# Allegro board wireless_cmsis_dap_sent_V2.brd
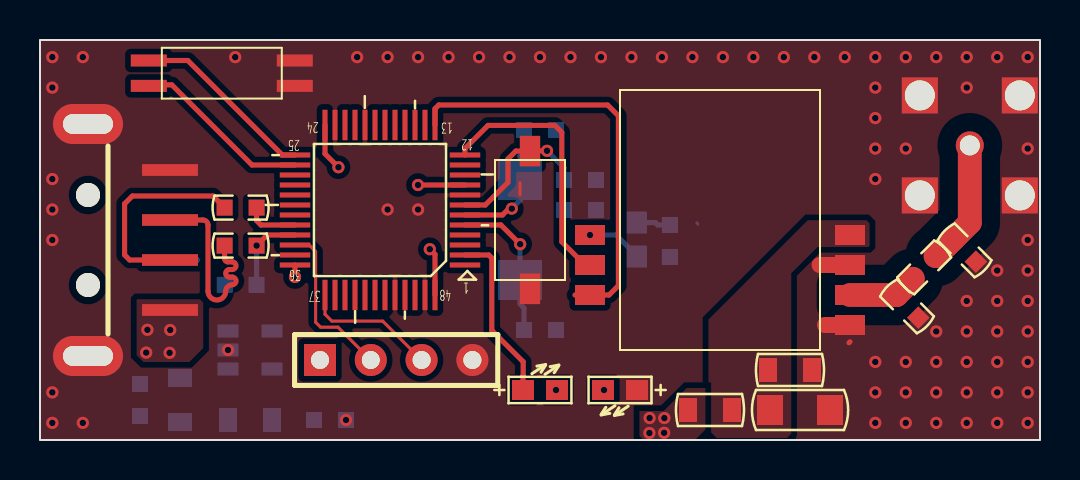
[diagram p0: board, top side]
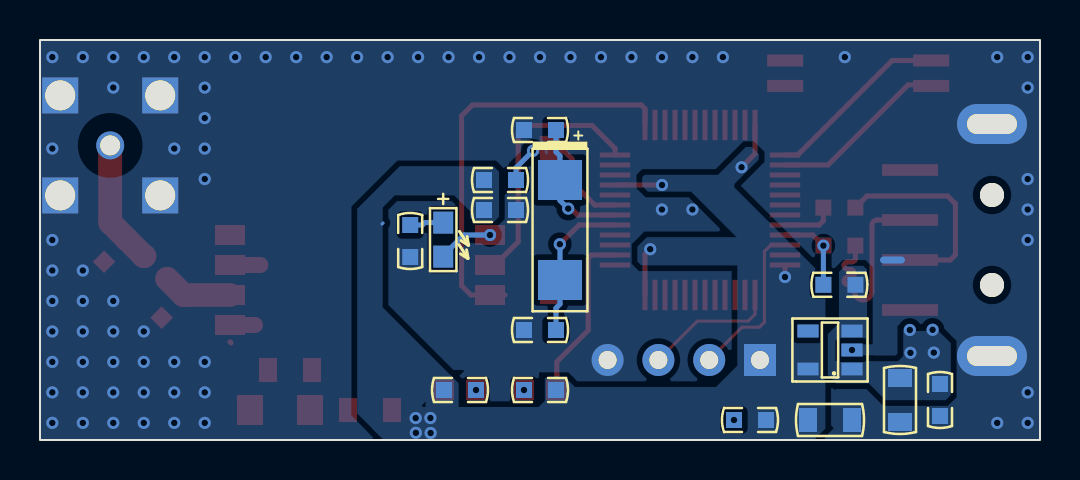
[diagram p1: board, bottom side, seen from below]

Outline 50 x 20 mm; copper layers: TOP, BOTTOM. Coordinates in mm from the lower left corner of the outline.
Outline path: rectangle 0,0 50,20

## Design rules (mm)
constraint set DEFAULT: min track width 0.152

## Placement (name value [footprint] x y rotation side)
C1  20p  [C0603]  25 5.5 180 bottom
C2  20p  [C0603]  25 15.5 180 bottom
C3  105  [C0603]  27 11.5 0 bottom
C4  103  [C0603]  5 2 270 bottom
C6  223  [C0805]  10.5 1 0 bottom
C7  106  [C0603]  14.5 1 180 bottom
C8  103  [C0805]  37.5 3.5 0 top
C9  100u  [C1206]  38 1.5 0 top
C10  223  [C0805]  7 2 270 bottom
C11  0  [C0603]  43.35 6.68 135 top
C12  0  [C0603]  46.23 9.48 135 top
D1  LED  [LED0603]  29.84 10.02 270 bottom
D2  LED  [LED0603]  25 2.5 0 top
D3  LED  [LED0603]  29 2.5 180 top
J1  SWD_DOWNLOAD  [SIP4]  14 4 0 top
J2  SMA  [SMA_KWE]  46.49 14.73 0 top
R1  10K  [C0603]  27 13 0 bottom
R2  20R  [C0603]  10.03 11.62 0 top
R3  20R  [C0603]  10.03 9.72 0 top
R4  4.7K  [C0603]  10.03 7.76 0 bottom
R5  510R  [C0603]  31.49 9.95 90 bottom
R6  510R  [C0603]  25 2.5 0 bottom
R7  510R  [C0603]  29 2.5 180 bottom
R8  0  [C0805]  33.5 1.5 180 top
R9  0  [C0603]  44.21 8.63 225 top
SW1  RST  [KEY_SMD]  24.5 11 90 top
SW2  SW DIP-2/SM  [SWITCH_2_SMD]  9.09 18.34 0 top
U1  STM32F103C8T6  [LQFP48]  17 11.5 180 top
U2  SPX3819M5-L-3-3  [SOT23-5]  10.5 4.5 90 bottom
U3  USB_A  [USB_A_SMT]  4.5 6.5 180 top
U5  HC25_SMT  [HC_25_SMT_N]  34 11 180 top
Y1  CRYSTAL13  [50322]  24 10.5 270 bottom

## Library data of the parts
C1-C4 C6-C12 = CAP NP
D1-D3 = LED
J1 = 4 HEADER
J2 = SMA
R1-R9 = RESISTOR
SW1 = SW MAG-SPST/SM
SW2 = SW DIP-2/SM
U1 = STM32F103C8T6
U2 = SPX3819M5-L-3-3
U3 = USB_A
U5 = HC25_SMT
Y1 = CRYSTAL13_0

## Footprints (pads in the part's own frame, mm; a bottom-side part is the same pattern mirrored in y, then rotated)
50322
  rect 2x2.2 smd: 1(-2.5,0) 2(2.5,0)
C0603
  rect 0.8x0.8 smd: 1(-0.8,0) 2(0.8,0)
C0805
  rect 0.9x1.2 smd: 1(-1.1,0) 2(1.1,0)
C1206
  rect 1.3x1.5 smd: 1(-1.5,0) 2(1.5,0)
HC_25_SMT_N
  rect 1.5x1 smd: 1(-6.5,5.25) 2(-6.5,3.75) 3(-6.5,2.25) 4(-6.5,0.75) 13(6.5,0.75) 14(6.5,2.25) 15(6.5,3.75)
KEY_SMD
  rect 1.524x1.016 smd: 1(-3.445,0) 2(3.445,0)
LED0603
  rect 1.1x1 smd: 1(-0.85,0) 2(0.85,0)
LQFP48
  rect 1.52x0.25 smd: 1(-4.25,2.75) 2(-4.25,2.25) 3(-4.25,1.75) 4(-4.25,1.25) 5(-4.25,0.75) 6(-4.25,0.25) 7(-4.25,-0.25) 8(-4.25,-0.75) 9(-4.25,-1.25) 10(-4.25,-1.75) 11(-4.25,-2.25) 12(-4.25,-2.75) 25(4.25,-2.75) 26(4.25,-2.25) 27(4.25,-1.75) 28(4.25,-1.25) 29(4.25,-0.75) 30(4.25,-0.25) 31(4.25,0.25) 32(4.25,0.75) 33(4.25,1.25) 34(4.25,1.75) 35(4.25,2.25) 36(4.25,2.75)
  rect 0.25x1.52 smd: 13(-2.75,-4.25) 14(-2.25,-4.25) 15(-1.75,-4.25) 16(-1.25,-4.25) 17(-0.75,-4.25) 18(-0.25,-4.25) 19(0.25,-4.25) 20(0.75,-4.25) 21(1.25,-4.25) 22(1.75,-4.25) 23(2.25,-4.25) 24(2.75,-4.25) 37(2.75,4.25) 38(2.25,4.25) 39(1.75,4.25) 40(1.25,4.25) 41(0.75,4.25) 42(0.25,4.25) 43(-0.25,4.25) 44(-0.75,4.25) 45(-1.25,4.25) 46(-1.75,4.25) 47(-2.25,4.25) 48(-2.75,4.25)
SIP4
  rect 1.6x1.6 hole 0.9: 1(0,0)
  round 1.6 hole 0.9: 2(2.54,0) 3(5.08,0) 4(7.62,0)
SMA_KWE
  rect 1.8x1.8 hole 1.5: 1(-2.5,2.5) 2(-2.5,-2.5) 3(2.5,-2.5) 4(2.5,2.5)
  round 1.4 hole 1: 5(0,0)
SOT23-5
  rect 0.65x1.06 smd: 1(-0.95,-1.1) 2(0,-1.1) 3(0.95,-1.1) 4(0.95,1.1) 5(-0.95,1.1)
SWITCH_2_SMD
  rect 1.8x0.6 smd: 1(-3.65,0.635) 2(-3.65,-0.635) 3(3.65,-0.635) 4(3.65,0.635)
USB_A_SMT
  round 1.2 hole 1.2 unplated: (2.1,-1.25) (2.1,-5.75)
  rect 2.794x0.584 smd: 1(-2,0) 2(-2,-2.5) 3(-2,-4.5) 4(-2,-7)
  oval 3.5x2 hole 2.5x1: 5(2.1,2.3) 6(2.1,-9.3)

## Nets
3V3: C3.2 C6.2 C7.2 J1.1 R1.2 R6.1 R7.1 R8.2 U1.9 U1.24 U1.36 U1.48 U2.5(VOUT)
3V3_WIFI: C8.1 C9.1 R8.1 U5.4(VCC)
5V: C4.1 C10.1 R4.1 U2.1 U2.3 U3.1(VCC)
GND: C1.1 C2.1 C3.1 C4.2 C6.1 C7.1 C8.2 C9.2 C10.2 C11.1 C12.1 D3.1(CATHODE) J1.4 J2.1 J2.2 J2.3 J2.4 R5.1 SW1.1 SW2.3(B2) SW2.4 U1.8 U1.20 U1.23 U1.35 U1.44 U1.47(VSS_3) U2.2 U3.4 U3.5 U3.6 U5.1 U5.3
VBAT: U1.1
ANT: C11.2 R9.2 U5.2
ANT_SMA: C12.2 J2.5 R9.1
CONTROLLER_RX: U1.13 U5.15
CONTROLLER_TX: U1.12 U5.14
HC25_LED: D1.2 U5.13
PA11: R2.2 U1.32
PA12: R3.2 R4.2 U1.33
PC13: D2.1(CATHODE) U1.2
SW1: SW2.1 U1.25
SW2: SW2.2 U1.26
SWCLK: J1.3 U1.37
SWD: J1.2 U1.34
N00886: C1.2 U1.5 Y1.2
N00904: C2.2 U1.6 Y1.1
N01271: R1.1 SW1.2 U1.7
N03041: R2.1 U3.2
N03045: R3.1 U3.3
N11945: D1.1(CATHODE) R5.2
N11949: D2.2 R6.2
N11983: D3.2 R7.2

Pads without a net: U1 3 4 10 11 14 15 16 17 18 19 21 22 27 28 29 30 31 38 39 40 41 42 43 45 46; U2 4

## Via types
v1: diameter 0.61, hole 0.33, TOP to BOTTOM, 91 vias

## Routing (per net, layer and track width the routed paths; a pad name or vN(x,y) marks a point on that pad's centre or on a via; arc(x,y) is an arc through that point)
3V3: length 7.9
  TOP w0.254: v1(14.92,13.64) 14.25,14.31 U1.24 ; U1.36 v1(12.75,8.15) ; v1(19.49,9.54) 19.75,9.28 U1.48 ; U1.9 v1(18.9,12.75)
  BOTTOM w0.152: 32.9,10.8 32.85,10.85
  BOTTOM w0.254: 30.45,1.08 30.45,1.11 30.47,1.11 v1(30.48,1.1)
  vias: v1(30.47,0.35) v1(31.22,1.1) v1(31.21,0.36)
5V:
  vias: v1(5.31,4.37) v1(5.37,5.51) v1(6.51,5.5) v1(6.48,4.36)
GND: length 4.6
  TOP w0.152: 24,12.85 24,12.26
  TOP w0.254: 40.5,4.91 40.45,4.86 ; 39.17,5.67 39.25,5.75 ; 38.86,8.63 38.98,8.75
  TOP w0.8: 39.25,5.75 U5.1 ; 38.98,8.75 U5.3
  BOTTOM w0.254: v1(9.4,4.5) 9.4,4.49
  BOTTOM w0.354: 7.82,9 6.93,9
  vias: v1(0.62,19.14) v1(0.62,17.62) v1(0.62,13.05) v1(0.62,11.52) v1(0.62,10) v1(0.62,2.38) v1(0.62,0.86) v1(2.14,19.14) v1(2.14,0.86) v1(9.76,19.14) v1(15.3,1) v1(15.86,19.14) v1(17.38,19.14) v1(17.38,11.52) v1(18.9,19.14) v1(18.9,11.52) v1(20.43,19.14) v1(21.95,19.14) v1(23.48,19.14) v1(25,19.14) v1(26.52,19.14) v1(28.05,19.14) v1(29.57,19.14) v1(31.1,19.14) v1(32.62,19.14) v1(34.14,19.14) v1(35.67,19.14) v1(37.19,19.14) v1(38.72,19.14) v1(40.24,19.14) v1(41.76,19.14) v1(41.76,17.62) v1(41.76,16.1) v1(41.76,14.57) v1(41.76,13.05) v1(41.76,3.9) v1(41.76,2.38) v1(41.76,0.86) v1(43.29,19.14) v1(43.29,14.57) v1(43.29,3.9) v1(43.29,2.38) v1(43.29,0.86) v1(44.81,19.14) v1(44.81,5.43) v1(44.81,3.9) v1(44.81,2.38) v1(44.81,0.86) v1(46.34,19.14) v1(46.34,17.62) v1(46.34,6.95) v1(46.34,5.43) v1(46.34,3.9) v1(46.34,2.38) v1(46.34,0.86) v1(47.86,19.14) v1(47.86,8.48) v1(47.86,6.95) v1(47.86,5.43) v1(47.86,3.9) v1(47.86,2.38) v1(47.86,0.86) v1(49.38,19.14) v1(49.38,14.57) v1(49.38,10) v1(49.38,8.48) v1(49.38,6.95) v1(49.38,5.43) v1(49.38,3.9) v1(49.38,2.38) v1(49.38,0.86)
ANT: length 3.5
  TOP w1.19: U5.2 42.78,7.25 C11.2 42.83,7.25 R9.2
ANT_SMA: length 6.3
  TOP w1.19: R9.1 44.81,9.2 C12.2 46.49,10.87 J2.5
CONTROLLER_RX: length 21.1
  TOP w0.254: 26.75,7.25 U5.15 28.45,7.25 28.92,7.72 28.92,16.21 28.38,16.75 19.94,16.75 19.75,16.56 U1.13
CONTROLLER_TX: length 13.2
  TOP w0.254: U1.12 21.25,14.58 22.4,15.73 25.74,15.73 26.09,15.38 26.09,9.91 27.25,8.75 U5.14
HC25_LED: length 2.8
  BOTTOM w0.254: D1.2 29.84,9.22 28.81,10.25 v1(27.5,10.25)
PA11: length 2.7
  TOP w0.254: R2.2 10.83,10.97 11.05,10.75 U1.32
PA12: length 4.1
  TOP w0.254: v1(10.83,9.72) 11.36,10.25 U1.33
  BOTTOM w0.254: R4.2 v1(10.83,9.72)
PC13: length 8.7
  TOP w0.254: U1.2 22.44,9.25 22.59,9.1 22.59,5.48 24.16,3.91 24.16,3.21 24.15,3.2 D2.1
SW1: length 9.3
  TOP w0.254: SW2.1 7.39,18.98 12.12,14.25 U1.25
SW2: length 9
  TOP w0.254: SW2.2 5.49,17.76 6.59,17.76 10.6,13.75 U1.26
SWCLK: length 6.7
  TOP w0.152: U1.37 14.25,6.29 14.59,5.94 17.14,5.94 J1.3
SWD: length 8.2
  TOP w0.152: U1.34 13.46,9.75 13.78,9.43 13.78,5.89 14.03,5.64 14.9,5.64 J1.2
N00886: length 7.5
  TOP w0.254: v1(24.01,9.79) 23.05,10.75 U1.5
  BOTTOM w0.254: v1(24.01,9.79) 24,9.78 Y1.2 24,6.8 24.2,6.6 C1.2
N00904: length 6.7
  TOP w0.254: U1.6 23.12,11.25 23.44,11.57 v1(23.59,11.57)
  BOTTOM w0.254: C2.2 24.2,14.4 24,14.2 Y1.1 24,11.98 v1(23.59,11.57)
N01271: length 7.7
  TOP w0.254: v1(25.35,14.46) 24.52,14.46 SW1.2 23.79,14.45 23.4,14.06 23.4,12.89 22.26,11.75 U1.7
  BOTTOM w0.254: v1(25.35,14.46) 26.2,13.61 R1.1
N03041: length 10.8
  TOP w0.254: U3.2 4.48,9 4.23,9.25 4.23,11.81 4.62,12.2 8.65,12.2 R2.1
  TOP w0.4: U3.2 6.93,9
N03045: length 10.4
  TOP w0.254: R3.1 9.23,9.07 arc(9.28,8.95) 9.39,8.91 9.61,8.91 arc(9.8,8.71) 9.61,8.52 9.48,8.52 arc(9.29,8.33) 9.48,8.14 9.61,8.14 arc(9.8,7.95) 9.61,7.76 arc(9.38,7.66) 9.29,7.44 arc(8.84,6.99) 8.4,7.44 8.4,10.75 arc(8.33,10.93) 8.15,11 U3.3
N11945: length 1.7
  BOTTOM w0.254: D1.1 30.77,10.87 30.89,10.75 R5.2
N11949:
  vias: v1(25.8,2.5)
N11983:
  vias: v1(28.2,2.5)

## Copper pours and planes (outline as drawn; the poured copper is in the pictures)
3V3 on TOP: 29.97,1.45 29.97,0.2 30.13,0.04 32.79,0.04 33.27,0.52 33.27,2.6 32.33,2.6 31.18,1.45
3V3 on BOTTOM: 15.01,10.14 19.66,10.14 20.13,9.67 20.13,8.92 19.94,8.73 14.69,8.73 14.69,9.82
3V3 on BOTTOM: 10.73,8.08 10.73,0.61 10.71,0.59 11.27,0.03 32.85,0.03 33.42,0.6 33.42,2.45 33.29,2.58 31.77,2.58 30.84,1.65 25.07,1.65 24.76,1.96 24.76,3.1 23.7,3.1 23.25,2.65 16.2,2.65 15.13,3.72 15.13,10.1 17.45,12.42 19.61,12.42 19.89,12.7 19.89,13.14 19.77,13.26 16.1,13.26 14.71,14.65 14.42,14.65 14.06,14.29 14.06,14.02 15.28,12.8 15.28,12.63
3V3 on BOTTOM: 29.42,3.22 29.45,3.22 32.87,6.64 32.87,11.62 32.26,12.23 29.29,12.23 28.5,11.44 28.5,11.13 28.23,10.86 27.35,10.86 27.05,11.16 27.05,13.42 27.32,13.69 32.01,13.69 34.14,11.56 34.14,1.33 33.04,0.23 32.41,0.23
3V3 on BOTTOM: 29.07,1.31 29.07,2.84 29.48,3.25 30.58,3.25 30.72,3.11 30.72,1.6 30.43,1.31
3V3_WIFI on TOP: 33.42,6.02 33.42,0.51 33.83,0.1 37.35,0.1 37.56,0.31 37.56,8.33 38.88,9.65 41.42,9.65 41.48,9.71 41.48,10.83 41.32,10.99 38.39,10.99
5V on TOP: 4.83,7.01 4.83,4.24 5.17,3.9 7.47,3.9 8.16,4.59 8.16,6.87 7.99,7.04 4.86,7.04
5V on BOTTOM: 4.46,4.84 4.46,2.25 4.72,1.99 7.72,1.99 8.56,2.83 10.21,2.83 10.3,2.92 10.3,3.95 8.42,3.95 8.41,3.94 7.1,3.94 6.84,4.2 6.84,5.45 5.07,5.45
5V on BOTTOM: 10.23,2.9 10.23,4.95 10.11,5.07 8.65,5.07 8.65,8.52 8.84,8.71 9.75,8.71 10.05,8.41 10.05,5.85 10.61,5.29 10.61,3.26 10.24,2.89
GND on TOP: 0,20 50,20 50,0 0,0 ; 2 cut-outs
GND on BOTTOM: 0,20 50,20 50,0 0,0

## Text on the board
Board Geometry/Soldermask Top: By Sun | 5-18
NCLEGEND-1-2: FIGURE | FINISHED_SIZE | 0.3302 | 0.9 | 1.0 | 1.5 | 1.2 | 2.5x1.0 | DRILL CHART: TOP to BOTTOM | ALL UNITS ARE IN MILLIMETERS | PLATED | NON-PLATED | QTY | 91 | 3 | 1 | 4 | 2
